# Altium PCB ESC.PcbDoc
Units mil, origin at the board's own origin, x right, y up, seen from the top; angles counter-clockwise.
Board outline 630 x 630 mil, 2 copper layers (Top Layer, Bottom Layer); 41 components, 23 nets, 97 pads, 63 vias.
Unrouted connection lines stored in the file: 1.
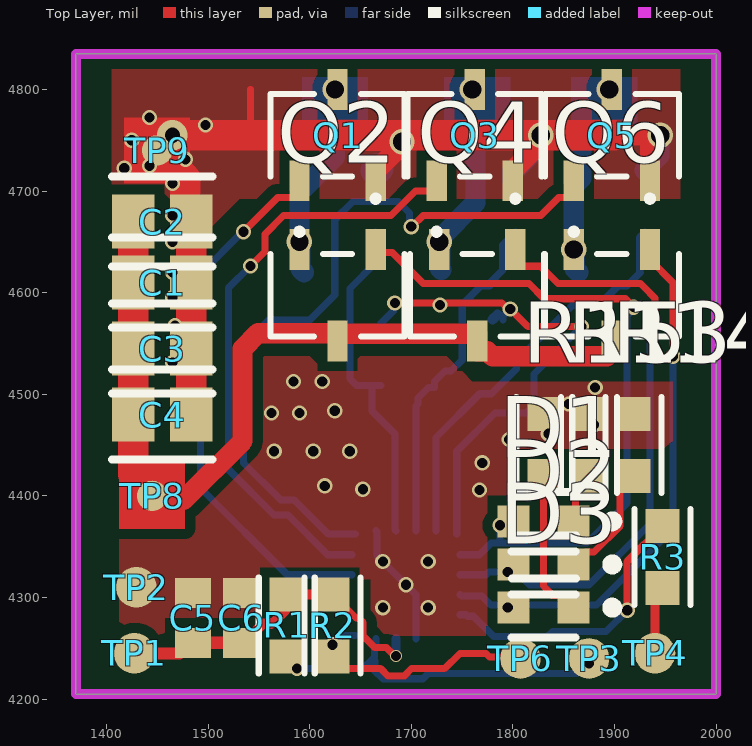
[diagram p0: Top Layer view]
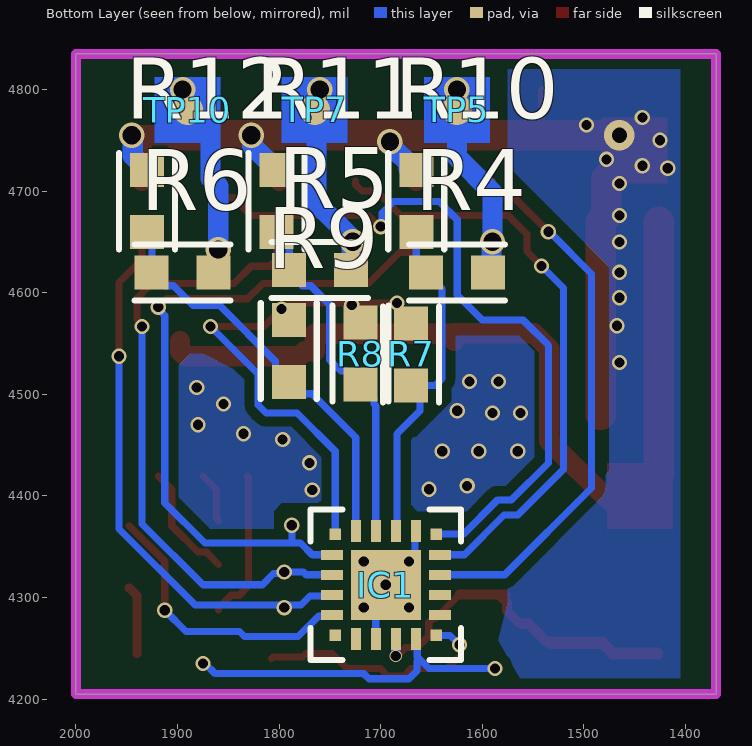
[diagram p1: Bottom Layer view, seen from below]
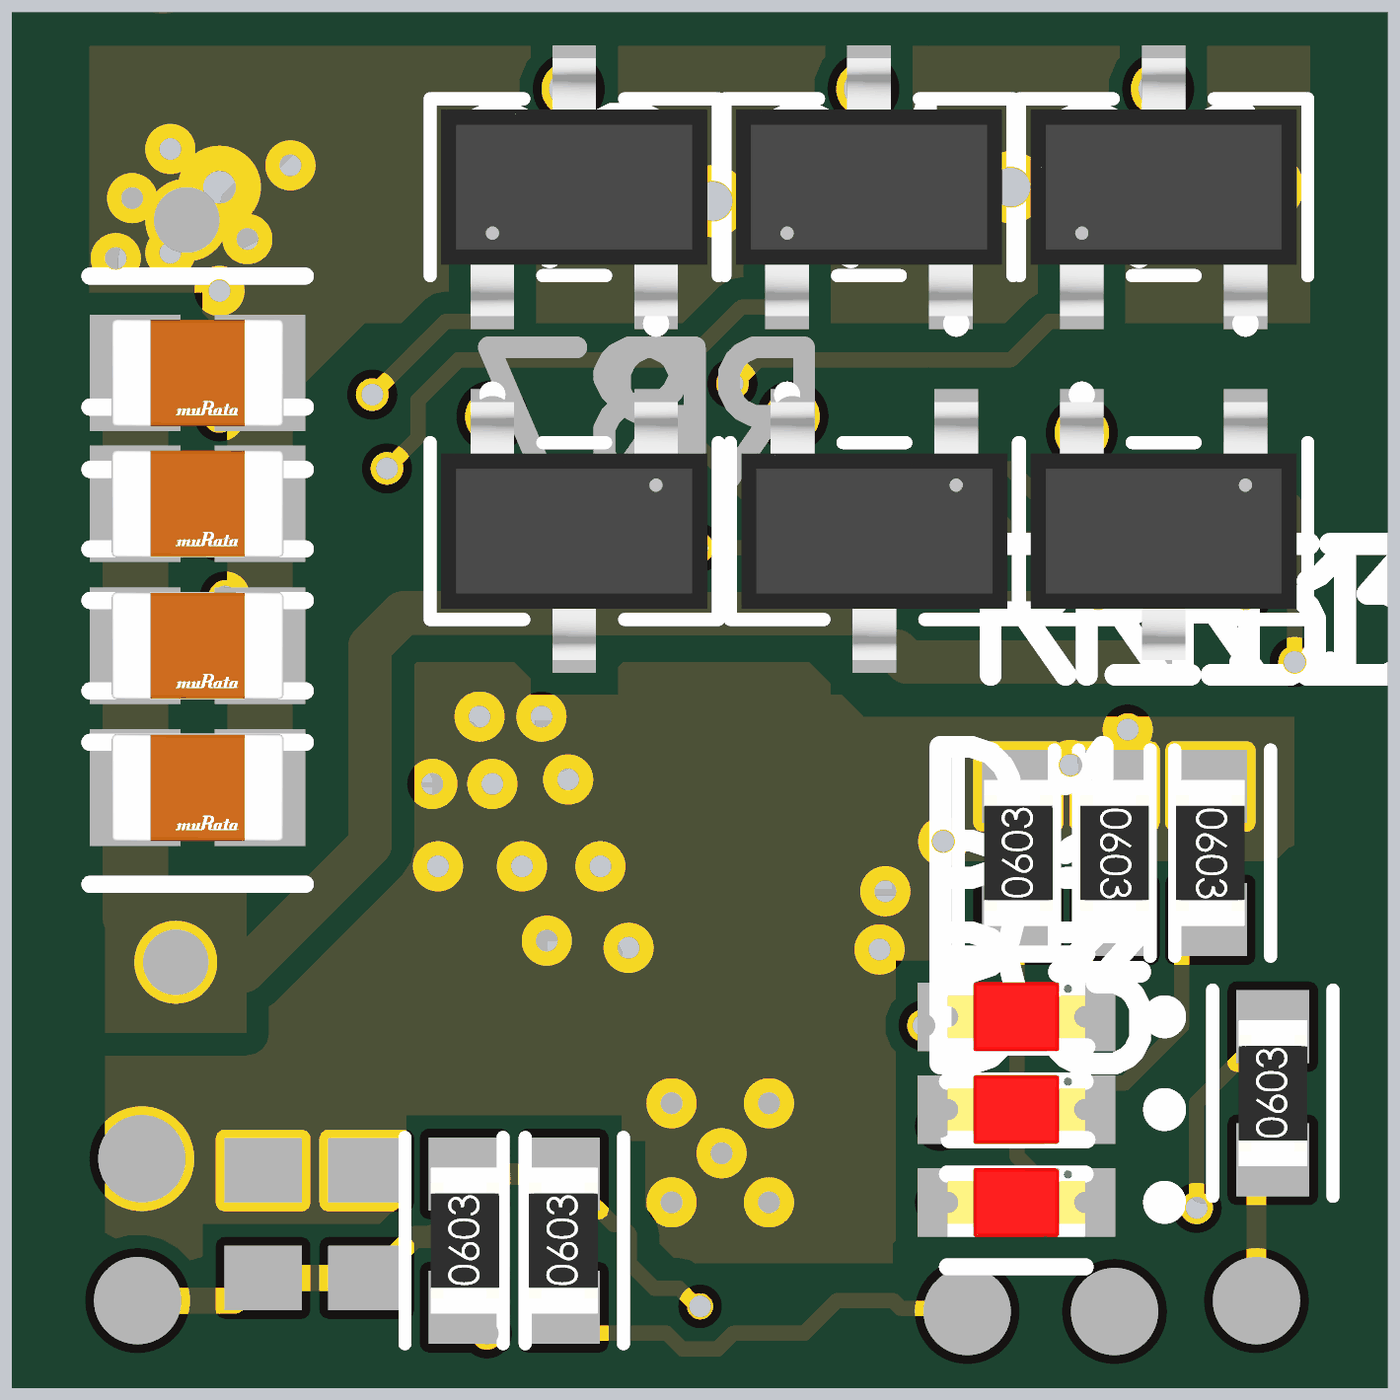
[diagram p2: 3D render of the assembled board from above, using the file's embedded part models]
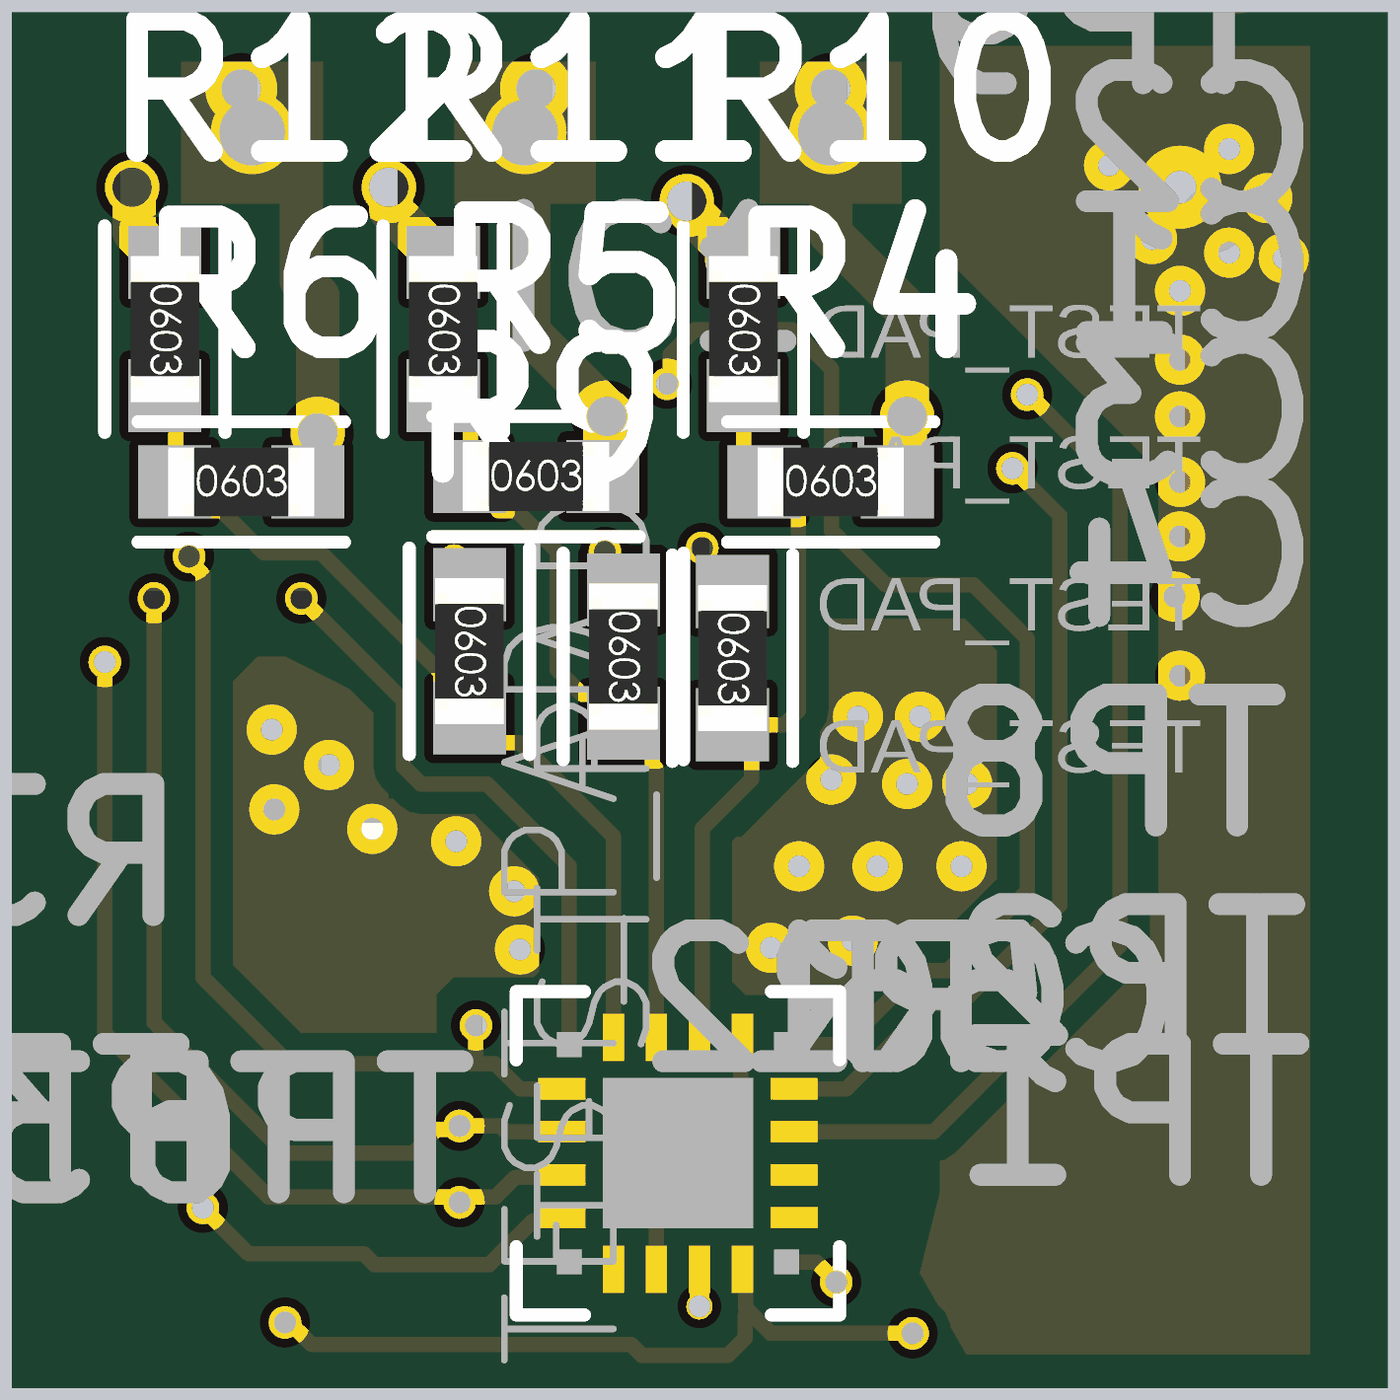
[diagram p3: 3D render of the assembled board from below, using the file's embedded part models]

## Layer stack, top to bottom
Top Solder: solder mask 0.4, Solder Resist, Dk 3.5
Top Layer: signal copper 1.4
Dielectric 1: dielectric 12.6, FR-4, Dk 4.8
Bottom Layer: signal copper 1.4
Bottom Solder: solder mask 0.4, Solder Resist, Dk 3.5

## Board outline
1370,4205 1370,4835 2000,4835 2000,4205

## Design rules (kind name [scope] priority, off if disabled: settings)
Clearance [All] p1: gap=10 ignorepadtopadclearanceinfootprint=TRUE except(0: Arc-Hole Track-Hole SMDPad-Hole THPad-Hole Via-Hole Fill-Hole Poly-Hole Region-Hole Text-Hole; 8: Arc-Arc Arc-Track Track-Track)
PlaneConnect [All] p1: pad.planeconnectstyle=Relief pad.reliefexpansion=20 pad.reliefentries=4 pad.reliefconductorwidth=10 pad.reliefairgap=10 via.planeconnectstyle=Direct via.reliefexpansion=20 via.reliefentries=4 via.reliefconductorwidth=10 via.reliefairgap=10
PolygonConnect [All] p1: connectstyle=Direct reliefconductorwidth=10 reliefentries=4 polygonreliefangle="90 Angle" airgapwidth=10
RoutingVias [All] p1: holewidth=15 width=20 viastyle="Through Hole" minholewidth=10 minwidth=0 maxholewidth=28 maxwidth=50
SolderMaskExpansion [All] p1: expansion=4 istentingtop=FALSE
Width [All] p1: maxlimit=50 minlimit=5 preferedwidth=10 minimp=50.000000 maximp=50.000000 favimp=50.000000
29 further rules are at their usual default settings.

## Components (designator, comment, footprint, x,y, rotation, side; value= is the part's Value field where it differs from the comment)
C1 "GRM21BR60G476ME15L" FP-GRM21B-0_2-IPC_C 1455,4610 r0 top
C2 "GRM21BR60G476ME15L" FP-GRM21B-0_2-IPC_C 1455,4670 r0 top
C3 "GRM21BR60G476ME15L" FP-GRM21B-0_2-IPC_C 1455,4545 r0 top
C4 "GRM21BR60G476ME15L" FP-GRM21B-0_2-IPC_C 1455,4480 r0 top
C5 "VJ0603Y104KNXAO" CAPC1608X92X38LL15T08 1485,4280 r270 top
C6 "VJ0603Y104KNXAO" CAPC1608X92X38LL15T08 1532.5,4280 r270 top
D1 "SML-LX0603IW-TR" FP-SML-LX0603IW-TR-MFG 1830,4375 r180 top
D2 "SML-LX0603IW-TR" FP-SML-LX0603IW-TR-MFG 1830,4332.5 r180 top
D3 "SML-LX0603IW-TR" FP-SML-LX0603IW-TR-MFG 1830,4290 r180 top
IC1 "EFM8BB21F16G-B-QFN20" QFN20_3X3_SIL 1695,4312.5 r90 bottom
Q1 "AO3400" SOT-23-3L_AOS-L 1627.5,4755 r0 top
Q2 "AO3401A" SOT-23-3L_AOS-L 1627.5,4597.5 r180 top
Q3 "AO3400" SOT-23-3L_AOS-L 1762.5,4755 r0 top
Q4 "AO3401A" SOT-23-3L_AOS-L 1765,4597.5 r180 top
Q5 "AO3400" SOT-23-3L_AOS-L 1897.5,4755 r0 top
Q6 "AO3401A" SOT-23-3L_AOS-L 1897.5,4597.5 r180 top
R1 "Res3" SMD-0603-RES 1577.5,4272.5 r0 top value=10K
R2 "Res3" SMD-0603-RES 1622.5,4272.5 r0 top value=10K
R3 "Res3" SMD-0603-RES 1947.5,4340 r0 top value=1K
R4 "=VALUE" SMD-0603-RES 1625,4620 r270 bottom
R5 "=VALUE" SMD-0603-RES 1760,4622.5 r270 bottom
R6 "=VALUE" SMD-0603-RES 1895,4620 r270 bottom
R7 "=VALUE" SMD-0603-RES 1670,4539.27 r0 bottom
R8 "=VALUE" SMD-0603-RES 1720,4540.04 r0 bottom
R9 "=VALUE" SMD-0603-RES 1790.51,4542.42 r0 bottom
R10 "=VALUE" SMD-0603-RES 1665,4690 r0 bottom
R11 "=VALUE" SMD-0603-RES 1802.5,4690 r0 bottom
R12 "=VALUE" SMD-0603-RES 1930,4690 r0 bottom
R13 "470R" SMD-0603-RES 1875,4450 r180 top
R14 "470R" SMD-0603-RES 1918.91,4450 r180 top
R15 "470R" SMD-0603-RES 1831,4450 r0 top
TP1 "TEST_PAD" PCBCOMPONENT_1 1427.5,4245 r0 top
TP2 "TEST_PAD" PCBCOMPONENT_1 1429.46,4310 r0 top
TP3 "TEST_PAD" PCBCOMPONENT_1 1875,4240 r0 top
TP4 "TEST_PAD" PCBCOMPONENT_1 1940,4245 r0 top
TP5 "TEST_PAD" PAD_SQUARE 1625,4780 r180 bottom
TP6 "TEST_PAD" PCBCOMPONENT_1 1807.5,4240 r0 top
TP7 "TEST_PAD" PAD_SQUARE 1765,4780 r180 bottom
TP8 "TEST_PAD" PAD_SQUARE 1445,4400 r90 top
TP9 "TEST_PAD" PAD_SQUARE 1450,4740 r270 top
TP10 "TEST_PAD" PAD_SQUARE 1890,4780 r180 bottom

## Footprints (in the part's own frame and the unit in brackets; to place one, negate y for a bottom-side part, rotate by r counter-clockwise, add the part's x,y. Pads: shape width x height; smd on the part's side, far side on the other; paste and mask are expansions set on the pad)
CAPC1608X92X38LL15T08 [mm] "Chip Capacitor, 2-Leads, Body 1.60x0.80mm, IPC High Density"
  rect 0.75x0.9 smd: 1(-0.625,0) 2(0.625,0)
  body extent -0.87,-0.48 0.87,0.48, height 0.92
FP-GRM21B-0_2-IPC_C [mil]
  rect 41.52x53.39 smd paste+0 mask+0: 1(-28.57,0) 2(28.57,0)
  silkscreen extent -49,-44 49,44, body extent -53,-32 53,32, height 10
FP-SML-LX0603IW-TR-MFG [mm]
  rect 0.8x0.8 smd paste+0 mask+0: 1(-0.75,0) 2(0.75,0)
  silkscreen extent -1.85,-0.73 0.8,0.75, body extent -1.25,-0.63 1.25,0.63, height 0.25
PAD_SQUARE [mil]
  round 30 smd: 1(0,0)
  Top Layer region: -32.5,32.5 32.5,32.5 32.5,-32.5 -32.5,-32.5
PCBCOMPONENT_1 [mil]
  round 40 smd: 1(0,0)
QFN20_3X3_SIL [mm]
  rect 0.29x0.29 smd paste+0 mask+0: 1(-1.265,1.265) 6(-1.265,-1.265) 11(1.265,-1.265) 16(1.265,1.265)
  rect 0.55x0.25 smd paste-0.125 mask+0: 2(-1.35,0.75) 3(-1.35,0.25) 4(-1.35,-0.25) 5(-1.35,-0.75) 12(1.35,-0.75) 13(1.35,-0.25) 14(1.35,0.25) 15(1.35,0.75)
  rect 0.25x0.55 smd paste-0.125 mask+0: 7(-0.75,-1.35) 8(-0.25,-1.35) 9(0.25,-1.35) 10(0.75,-1.35) 17(0.75,1.35) 18(0.25,1.35) 19(-0.25,1.35) 20(-0.75,1.35)
  rect 1.75x1.75 smd paste+0 mask+0: 21(0,0)
  silkscreen extent -1.88,-1.88 1.88,1.88, body extent 0,0 0.25,0.25, height 0.25
SMD-0603-RES [mm]
  rect 0.85x0.85 smd: 1(0,0.775) 2(0,-0.775)
  silkscreen extent -0.7,-1.2 0.7,1.2, body extent -0.4,-0.85 0.4,0.85, height 0.56
SOT-23-3L_AOS-L [mil]
  rect 20x40 smd paste+0 mask+0: 1(-37.5,-45) 2(37.5,-45) 3(0,45)
  silkscreen extent -66,-98 66,40, body extent -61,-59 61,59, height 49

## Part data
C1 C2 C3 C4: library part CMP-2007-03226-2, "CAP CER 47UF 4V X5R 0805", Capacitance=47uF, Case Code (Imperial)=0805, Case Code (Metric)=2012, Dielectric=X5R, Max Operating Temperature=85°C, Min Operating Temperature=-55°C, Package Quantity=3000, Tolerance=20%, Voltage=4V, Case/Package=0805, Construction=Flat, Depth=1.25mm, Height=1.25mm, Lead Free="Lead Free", Length=2mm, Mount="Surface Mount", Packaging="Tape and Reel", Radiation Hardening=No, REACH SVHC="No SVHC", RoHS Compliant=Yes, Series=GRM, Termination=SMD/SMT, Thickness=0.053inch, Voltage Rating=4V, Voltage Rating (DC)=4V, Width=0.049inch
C5 C6: library part CMP-1035-02588-2, Manufacturer=Vitramon, Part Number=VJ0603Y104KNXAO
D1 D2 D3: library part CMP-57192-000012-1, "LED RED DIFFUSED SMD", Case Code (Imperial)=0603, Case Code (Metric)=1608, Color=Red, Forward Current=20mA, Forward Voltage=2V, Lens Color=White, Max Operating Temperature=85°C, Min Operating Temperature=-25°C, Package Quantity=1, Power Dissipation=50mW, Approvals=UL, Case/Package=0603, Diameter=0.061inch, Dominant Wavelength=635nm, Height=0.6mm, Illumination Color=Red, Lead Free="Lead Free", Length=1.6mm, Lens Style=Diffused, Lens Transparency=Diffused, Luminous Intensity=14mcd, Mount="Surface Mount", Number of LEDs=1, Number of Pins=2, Packaging="Tape and Reel", RoHS Compliant=Yes, Test Current=20mA, Viewing Angle=160°, Wavelength=635nm, Width=0.8mm
IC1: "No Description Available", Mfr_Name="Silicon Labs", Copyright="Copyright (C) 2023 Ultra Librarian. All rights reserved.", Manufacturer_Part_Number=EFM8BB21F16G-B-QFN20, RefDes=RefDes, Type=DEV
Q2 Q4 Q6: "MOSFET (P-Channel)", Manufacturer_Name="Alpha & Omega Semiconductors", Arrow Part Number=AO3401A, Arrow Price/Stock=https://www.arrow.com/en/products/ao3401a/alpha-and-omega-semiconductor?region=nac, Datasheet Link=http://www.aosmd.com/pdfs/datasheet/AO3401A.pdf, Height=1.25mm, Manufacturer_Part_Number=AO3401A
R1 R2 R3: "Resistor", LatestRevisionDate=29-May-2009, LatestRevisionNote="IPC-7351 Footprint Added.", PackageDescription="Chip Resistor", PackageReference=J1-0603, Published=8-Jun-2000, Publisher="Altium Limited"
R4 R5 R6 R7 R8 R9 R10 R11 R12 R13 R14 R15: library part RESISTOR

## Via types
v1: diameter 15, hole 10, Top Layer to Bottom Layer, 52 vias
v2: diameter 25, hole 18, Top Layer to Bottom Layer, 9 vias
v3: diameter 12, hole 10, Top Layer to Bottom Layer, 1 vias
v4: diameter 30, hole 15, Top Layer to Bottom Layer, 1 vias

## Nets (pads, with @x,y where several pads share a name; then routed paths per layer and width w, separated by ;. In a path a pad name is that pad's centre, name@x,y a point inside that pad or via, vN(x,y) a via of type N, cw(c..) or ccw(c..) an arc to the next point about the centre after c; other vN are vias at no path point)
A_HIGH: D1.2 IC1.17 Q2.1 | length 674.9
  Top Layer w7: Q2.1 1667.99,4639.51 1681.4,4639.51 1711.91,4609 1816,4609 1831,4594 1910.68,4594 v1(1918.91,4585.77)
  Bottom Layer w7: IC1.17 1767.34,4342.04 1778.33,4353.03 ; 1778.83,4353.52 1787.5,4353.52 1873.01,4353.52 1912.59,4393.1 1912.59,4577.67 1918.91,4583.99 v1(1918.91,4585.77) ; 1786.02,4354.22 1787.5,4356.02 v1(1787.5,4371.02)
A_LOW: IC1.9 Q1.1 | length 536.7
  Top Layer w7: v1(1535,4660) 1568.5,4693.5 1583.5,4693.5 1590,4700 Q1.1
  Bottom Layer w7: v1(1535,4660) 1534,4660 1492.5,4618.5 1492.5,4407.8 1577.96,4322.35 IC1.9
B_HIGH: D2.2 IC1.18 Q4.1 | length 605.4
  Top Layer w7: Q4.1 1802.5,4632.5 1809,4626 1827.41,4626 1844.41,4609 1925.7,4609 1935,4599.7 1935,4599.38 1939.91,4594.47 1939.91,4573.71 1935,4568.8 v1(1935,4566.63)
  Bottom Layer w7: IC1.18 1773.5,4322.35 1776.15,4325 v1(1795,4325) 1796.53,4323.47 1805.53,4323.47 1816.5,4312.5 1875.08,4312.5 1935,4372.42 v1(1935,4566.63)
B_LOW: IC1.10 Q3.1 | length 595.8
  Top Layer w7: v1(1541.75,4626.2) 1556,4640.45 1556,4657.59 1574.41,4676 1680.09,4676 1704.09,4700 1718.5,4700 1725,4706.5 Q3.1
  Bottom Layer w7: v1(1541.75,4626.2) 1520,4604.45 1520,4426.21 1565.1,4381.11 1578.59,4381.11 1617.66,4342.04 IC1.10
C2CK: IC1.5 R1.2 TP3.1 | length 330.1
  Bottom Layer w7: v1(1587.5,4230) 1652.4,4230 1662.31,4239.91 1664.04,4241.65 1664.04,4252.02 1665.47,4253.44 IC1.5 ; 1664.16,4238.07 1664.16,4227.94 1672.09,4220 1711.69,4220 1716.69,4225 1862.84,4225 1872.84,4235 v1(1875,4235)
C2D: IC1.6 R2.2 TP6.1 | length 230.7
  Top Layer w7: R2.2 1634.49,4230 1669.95,4230 1677.08,4222.87 1693.23,4222.87 1700.37,4230 1732.94,4230 1747.94,4245 1773.5,4245 1777,4241.5 1806,4241.5 TP6.1
  Bottom Layer w7: v1(1622.5,4253.5) 1631.7,4262.7 IC1.6
C_HIGH: D3.2 IC1.19 Q6.1 | length 528.9
  Top Layer w7: Q6.1 1935,4632.5 1957.5,4610 v1(1957.5,4537.5)
  Bottom Layer w7: IC1.19 1749.42,4301.39 1769.48,4301.39 1778.36,4292.5 1882.5,4292.5 1957.5,4367.5 v1(1957.5,4537.5)
  other v1: 1795,4290
C_LOW: IC1.11 Q5.1 | length 723.8
  Top Layer w7: v1(1700,4665) 1700.91,4665 1711.91,4676 1827.5,4676 1845,4693.5 1853.5,4693.5 1860,4700 Q5.1
  Bottom Layer w7: IC1.11 1618.62,4362.3 1584.8,4396.11 1571.32,4396.11 1535,4432.43 1535,4548.19 1559.74,4572.93 1599.98,4572.93 1624.72,4597.68 1624.72,4671.76 1642.68,4689.72 1687.32,4689.72 1698.47,4678.58 1698.47,4666.53 v1(1700,4665)
COM: IC1.16 R7.2 R8.2 R9.2 | length 512.5
  Top Layer w7: v1(1683.89,4589.77) 1728.46,4589.77 1789.48,4589.77 1795.34,4583.91 v1(1797.5,4583.91) 1814.78,4566.63 v1(1867.5,4566.63)
  Bottom Layer w7: R7.2 1683.23,4583.01 1683.23,4589.11 v1(1683.89,4589.77) ; IC1.16 1744.8,4443.94 1782.54,4481.68 1812.84,4481.68 1820.74,4489.59 1820.74,4519.88 v1(1867.5,4566.63) ; R9.2 1790.51,4576.92 v1(1797.5,4583.91)
  Bottom Layer w10: R9.2@1780.15,4573.71 R9.2@1784.94,4578.5
  other v1: 1728.46,4588
GND: C1.2 C2.2 C3.2 C4.2 C5.1 C6.1 IC1.3 IC1.12 IC1.21 Q1.2 Q3.2 Q5.2 R10.2 R11.2 R12.2 R13.2 R14.2 R15.1 TP2.1 TP9.1 | length 1291.3
  Top Layer w7: 1537.58,4755 1541.75,4759.17 1541.75,4800
  Top Layer w20: 1630,4755 1635,4750 v2@1689.04,4748.65 ; Q1.2 1665,4720 1689.04,4744.04 v2@1689.04,4748.65 ; 1769.82,4750.18 1774.64,4755 ; Q3.2 1800,4720 1822.59,4742.59 v2@1822.59,4750.18 ; 1900,4755 v2(1945,4755) 1945,4753.65 1935,4743.65 Q5.2 ; v2@1689.04,4748.65 v2(1690.97,4748.6) 1689.04,4749.04 v2@1689.04,4748.65
  Top Layer w30: TP9.1 TP9.1@1458.75,4731.25 ; 1465,4725 1477.81,4712.19 1477.81,4675.76 C2.2 C1.2 C3.2 C4.2 ; v4(1465,4755) v4@1467.5,4755 ; 1467.5,4722.5 v4@1467.5,4755 ; 1900,4755 v2(1827.41,4755) 1774.64,4755 1630,4755 1537.58,4755 v4@1467.5,4755
  Bottom Layer w7: IC1.12 1666.18,4364.94 1666.18,4341.32 v1(1695,4312.5) 1704.85,4302.65 IC1.3
  Bottom Layer w20: R10.2@1667.6,4722.24 1690.97,4745.61 v2(1690.97,4748.6) ; R11.2 1826.45,4744.46 1826.45,4754.04 v2(1827.41,4755) ; R12.2 1944.04,4734.56 1944.04,4754.04 v2(1945,4755)
  Bottom Layer w30: R10.2 1666.73,4722.24 R10.2@1667.6,4722.24
  other v1: 1672.09,4290 1716.69,4290 1672.09,4335.41 1716.69,4335.41 1767.34,4405.84 1652.4,4406.6 1614.93,4409.88 1770,4432.5 1565.1,4443.94 1603.56,4443.94 1639.5,4443.94 1796.53,4455.39 1835,4461.09 1879.86,4470 1562.5,4481.68 1590,4481.68 1624.72,4483.72 1854.8,4490.34 1881.05,4506.55 1612.5,4512.5 1584.13,4512.51 1465,4531.25 1467.5,4567.5 1465,4595 1465,4620 1465,4650 1465,4676 1465,4707.5 1417.5,4722.5 1442.5,4725 1477.81,4731.25 1425,4750 1497.5,4765 1442.5,4772.5
MUX_A: IC1.13 R4.2 R7.1 R10.1 | length 340.5
  Bottom Layer w7: R10.1 1665,4629.49 1639.77,4604.26 1639.77,4515.37 1646.38,4508.76 R7.1@1661.26,4508.76 ; R7.1 R7.1@1661.26,4508.76 ; IC1.13 1683.89,4366.92 1683.89,4461.09 1661.26,4483.72 R7.1@1661.26,4508.76
MUX_B: IC1.14 R5.2 R8.1 R11.1 | length 346.7
  Bottom Layer w7: IC1.14 1704.85,4488.42 1706.77,4490.34 1706.77,4496.3 1717.02,4506.55 1722.98,4506.55 1722.98,4512.51 1733.23,4522.76 1739.19,4522.76 1750.23,4533.81 1750.23,4588.19 1768.81,4606.77 1777.28,4606.77 1777.28,4609.27 R5.2 1790,4623.01 1790,4646.99 R11.1
MUX_C: IC1.15 R6.2 R9.1 R12.1 | length 406.1
  Bottom Layer w7: IC1.15 1724.54,4457.55 1767.55,4500.56 1779.16,4500.56 1803.74,4525.14 1803.74,4532.57 1858.8,4587.63 1884.68,4587.63 1903.81,4606.77 1912.28,4606.77 R6.2 ; R6.2@1925,4620 1925,4654.49 R12.1
NetD1_1: D1.1 R13.1 | length 50.9
  Top Layer w7: D1.1 1861.77,4377.24 1861.77,4406.26 R13.1
NetD2_1: D2.1 R14.1 | length 116.3
  Top Layer w7: D2.1 1871.78,4344.75 1879.86,4344.75 1905.68,4370.56 1905.68,4406.26 R14.1
NetD3_1: D3.1 R15.2 | length 149.1
  Top Layer w7: R15.2 1830.28,4418.77 1830.28,4311.16 1839.19,4302.25 1847.28,4302.25 D3.1 D3.1@1859.53,4287.5
NetR3_2: R3.2 TP4.1 | length 67.6
  Top Layer w9: TP4.1 1940,4301.99 R3.2
"PHASE A": Q1.3 Q2.2 R4.1 TP5.1 | length 176
  Bottom Layer w20: v2(1590,4650) 1590,4698.6 1625,4733.6 TP5.1 ; v2@1590.96,4650.04 1590.96,4623.53 R4.1
  other v2: 1625,4800
"PHASE B": Q3.3 Q4.2 R5.1 TP7.1 | length 173.9
  Bottom Layer w20: R5.1 1728.46,4623.53 1728.46,4649.04 v2(1727.5,4650) 1728.46,4650.96 1728.46,4653.67 1763.27,4688.48 1763.27,4778.27 TP7.1
  other v2: 1760,4800
"PHASE C": Q5.3 Q6.2 R6.1 TP10.1 | length 174.3
  Bottom Layer w20: R6.1 1860.96,4623.53 1860.96,4641.54 v2(1860,4642.5) 1860,4705 1867.5,4712.5 1867.5,4757.5 TP10.1
  other v2: 1895,4800
RC-IN: IC1.20 R3.1 | length 281.6
  Top Layer w7: v1(1912.59,4287.5) 1912.59,4335.6 R3.1
  Bottom Layer w7: IC1.20 1754.06,4282.97 1755.48,4281.54 1761.26,4281.54 1781.3,4261.5 1833.95,4261.5 1838.95,4266.5 1891.59,4266.5 v1(1912.59,4287.5)
VBAT: C1.1 C2.1 C3.1 C4.1 Q2.3 Q4.3 Q6.3 TP8.1 | length 899.1
  Top Layer w20: 1426.43,4421.28 1445,4402.71 TP8.1 ; TP8.1@1446.91,4401.91 1470,4401.91 ; 1475.96,4395.96 1534,4454 1534,4544.82 1549.18,4560 1627.5,4560 Q2.3 1627.5,4559.63 1765,4559.63 Q4.3@1765,4542.78 ; Q4.3 1765,4542.5 1775,4542.5 1780,4537.5 1892.5,4537.5 1897.5,4542.5 Q6.3
  Top Layer w30: 1426.43,4421.28 C4.1 C3.1 C1.1 C2.1
VCC3: C5.2 C6.2 IC1.4 R1.1 R2.1 TP1.1 | length 342.6
  Top Layer w7: R2.1 1645.63,4279.88 1648.13,4279.88 1652.73,4275.28 1652.73,4262.15 1664.13,4250.75 1675.42,4250.75 1683.8,4242.37 v3(1685.16,4242.37)
  Top Layer w10: C6.2 1535.45,4255.39 1554.2,4274.14 1561.7,4274.14 1562.4,4274.84 1563.93,4274.84 1575.77,4286.68 1575.77,4295.03 1580.62,4299.89 R1.1 R2.1
  Top Layer w12: TP1.1 1471.65,4245 1482.05,4255.39 C5.2 C6.2
  Bottom Layer w9: v3(1685.16,4242.37) IC1.4
pads on no net: IC1.1 IC1.2 IC1.7 IC1.8

## Polygon pours and split planes (outlines as drawn)
GND on Bottom Layer "GND_L02_P002" (solid, pour order 2): 1874.6,4540 1887.5,4540 1900,4527.5 1900,4399.42 1867.5,4366.92 1866.92,4367.5 1805.53,4367.5 1805.53,4385.07 1797.5,4393.1 1761.26,4393.1 1755.48,4398.88 1755.48,4443.94 1758.94,4443.94 1790,4475 1827.5,4475 1827.5,4512.38 1835,4519.88
GND on Bottom Layer "GND_L02_P000" (solid, pour order 0): 1405,4820 1400,4815 1400,4215 1559.89,4215 1584.31,4257.75 1575,4295 1575,4325 1475,4425 1475,4625 1575,4725 1575,4820
GND on Bottom Layer "GND_L02_P003" (solid, pour order 3): 1562.5,4557.5 1624.72,4557.5 1630,4552.22 1630,4493.25 1665.71,4457.55 1672.09,4457.55 1672.09,4393.1 1664.06,4385.07 1614.93,4385.07 1592.2,4407.8 1576.07,4407.8 1576.07,4409.62 1541.75,4443.94 1541.75,4537.5 1542.5,4537.5
GND on Top Layer "GND_L01_P005" (solid, pour order 5): 1968,4719.42 1968,4692.67 1531.41,4692.67 1495.5,4656.76 1495.5,4659.17 1448,4706.67 1405.5,4706.67 1403,4709.17 1403,4819.17 1400.5,4821.67 1403,4824.17 1566.5,4824.17 1968,4824.17
GND on Top Layer "GND_L01_P001" (solid, pour order 1): 1960,4515 1957.5,4512.5 1760,4512.5 1735,4537.5 1650,4537.5 1637.5,4525 1612.5,4525 1600,4537.5 1552.5,4537.5 1552.5,4450 1482.5,4380 1482.05,4380 1482.05,4366.09 1475.96,4360 1412.5,4360 1412.5,4255.39 1555,4255.39 1555,4318.13 1660,4318.13 1660,4277.57 1675.42,4262.15 1773.5,4262.15 1773.5,4271 1955,4452.5 1957.5,4450 1957.5,4515

## Keep-outs
Keep-Out Layer:
  the board outline again, w10
  text "115mil" at 1370,4835 h60

## Silkscreen, mask and mechanical layers (free items; w line width, h text height)
Bottom Component Center:
  lines w10: 1370,4206.25 1370,4321.25 ; 1370,4720 1370,4835

## Text inside footprints (layer, text, board x,y; h text height)
C1: Bottom Paste "TEST_PAD" at 1455,4616.99 h39.37
C2: Bottom Paste "TEST_PAD" at 1455,4676.99 h39.37
C3: Bottom Paste "TEST_PAD" at 1455,4551.99 h39.37
C4: Bottom Paste "TEST_PAD" at 1455,4486.99 h39.37
IC1: Bottom Paste "TEST_PAD" at 1724.38,4211.02 h50 r270; Bottom Paste "TEST_PAD" at 1709.38,4267.68 h50 r270